# Altium PCB PCB_Formation__ .PcbDoc
Units mm, origin at the board's own origin, x right, y up, seen from the top; angles counter-clockwise.
Board outline 40.25 x 18.25 mm, 4 copper layers (Top Layer, Layer 1, Layer 2, Bottom Layer), stack 0.603 mm thick; 22 components, 12 nets, 102 pads, 17 vias.
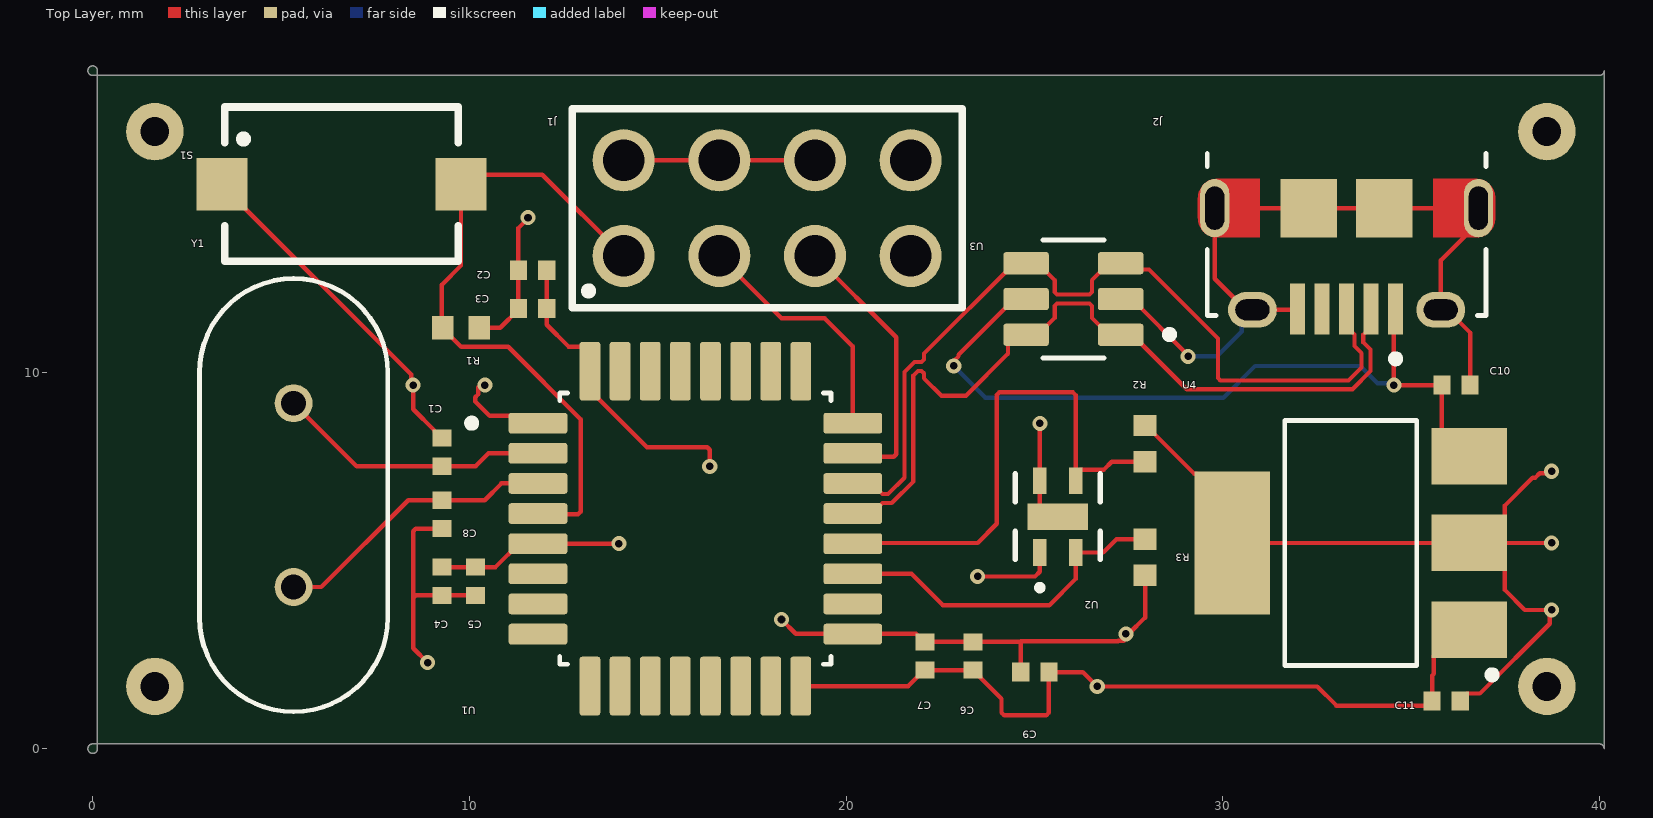
[diagram p0: Top Layer view]
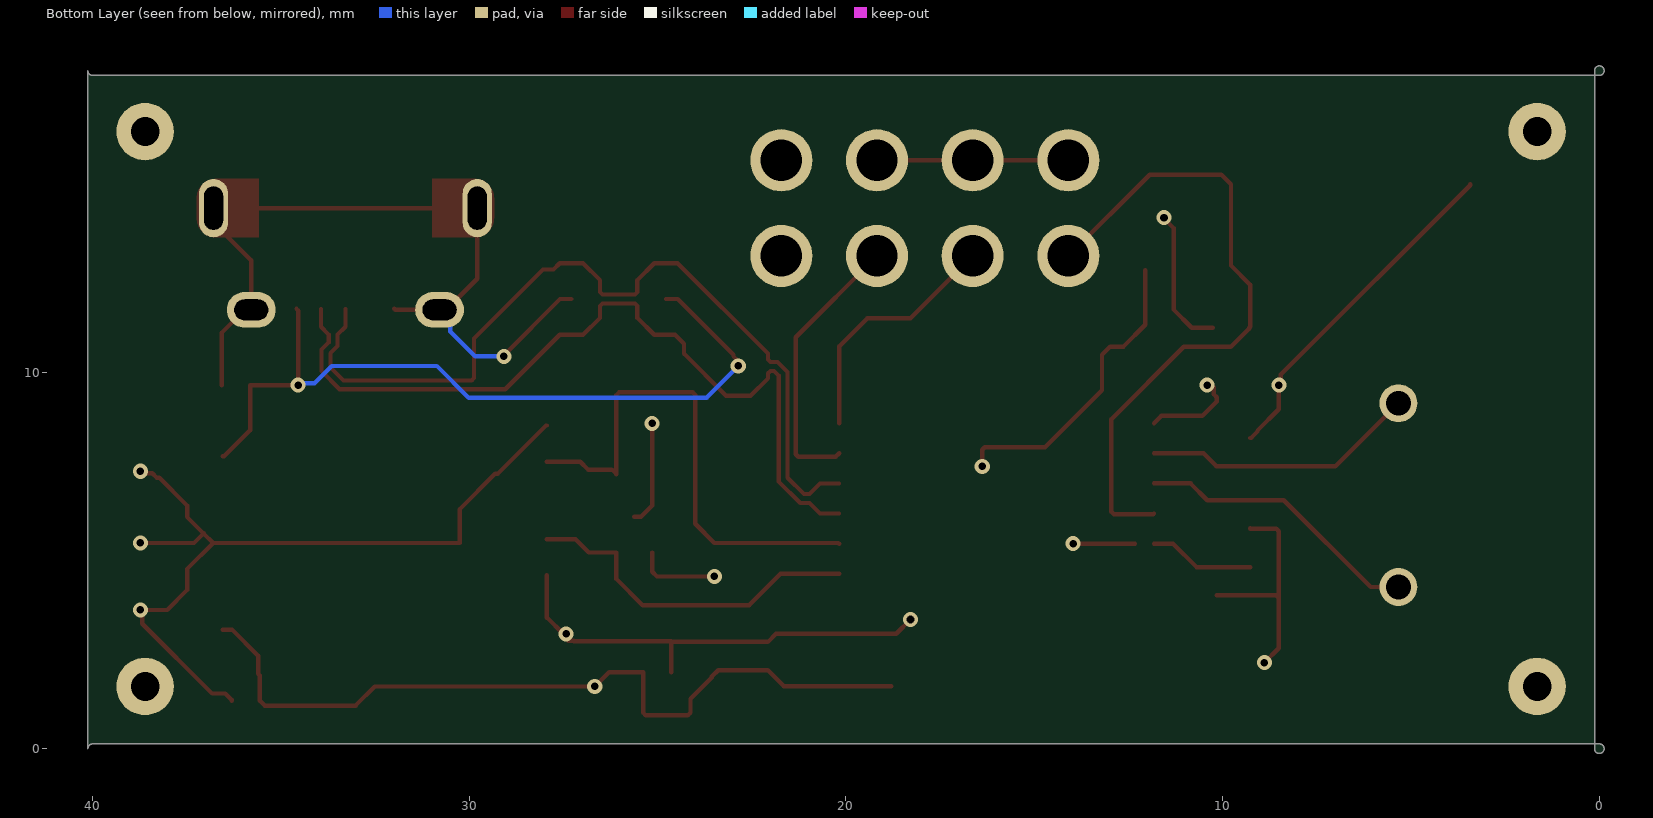
[diagram p1: Bottom Layer view, seen from below]
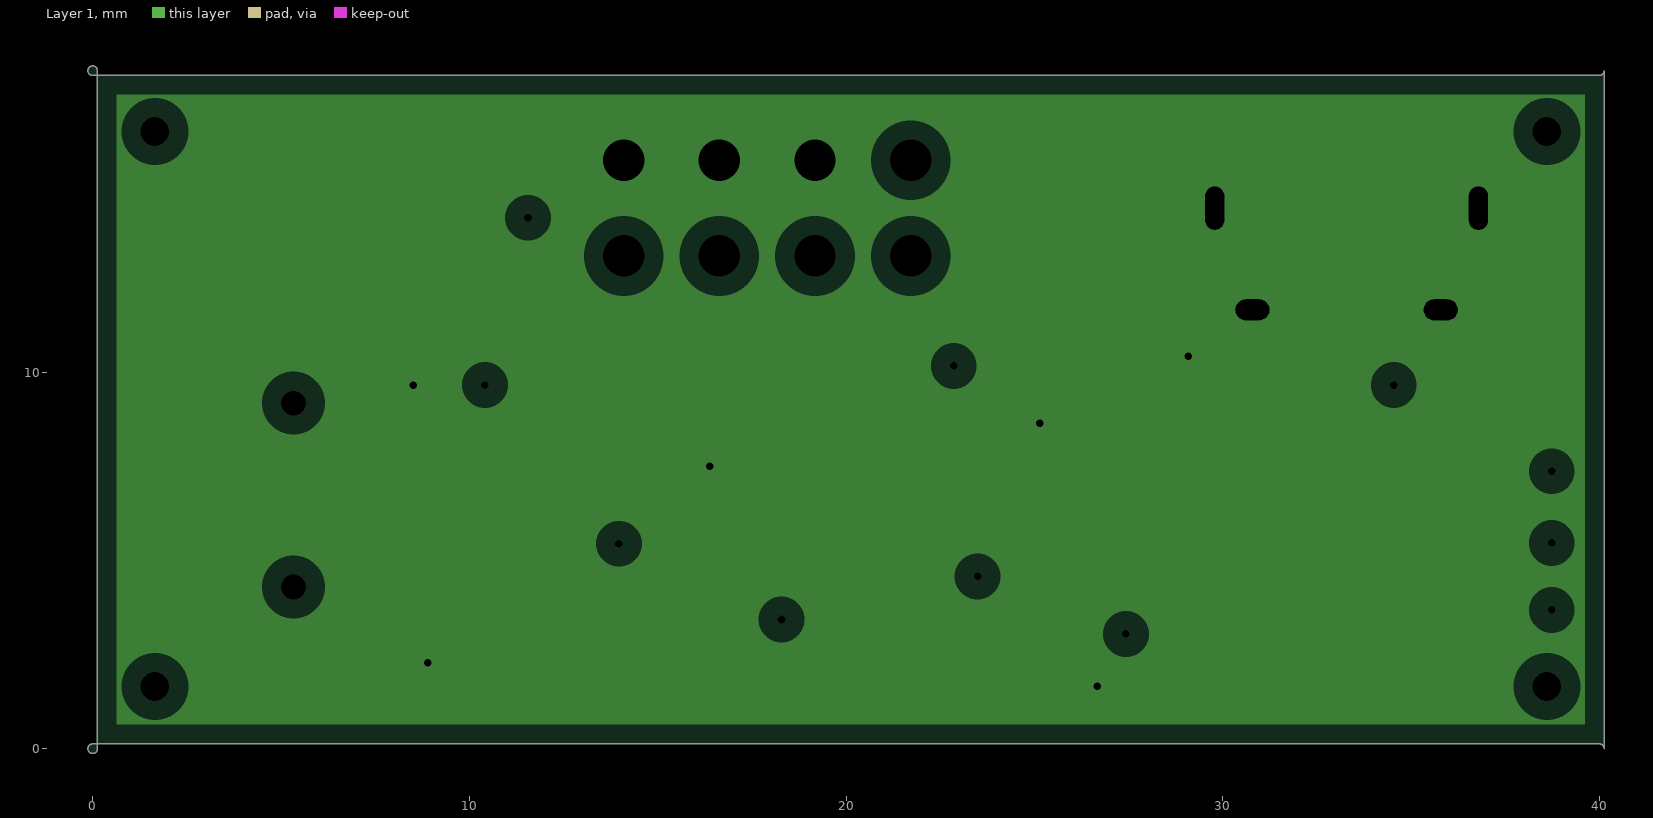
[diagram p2: Layer 1, clearances drawn from the general rule]
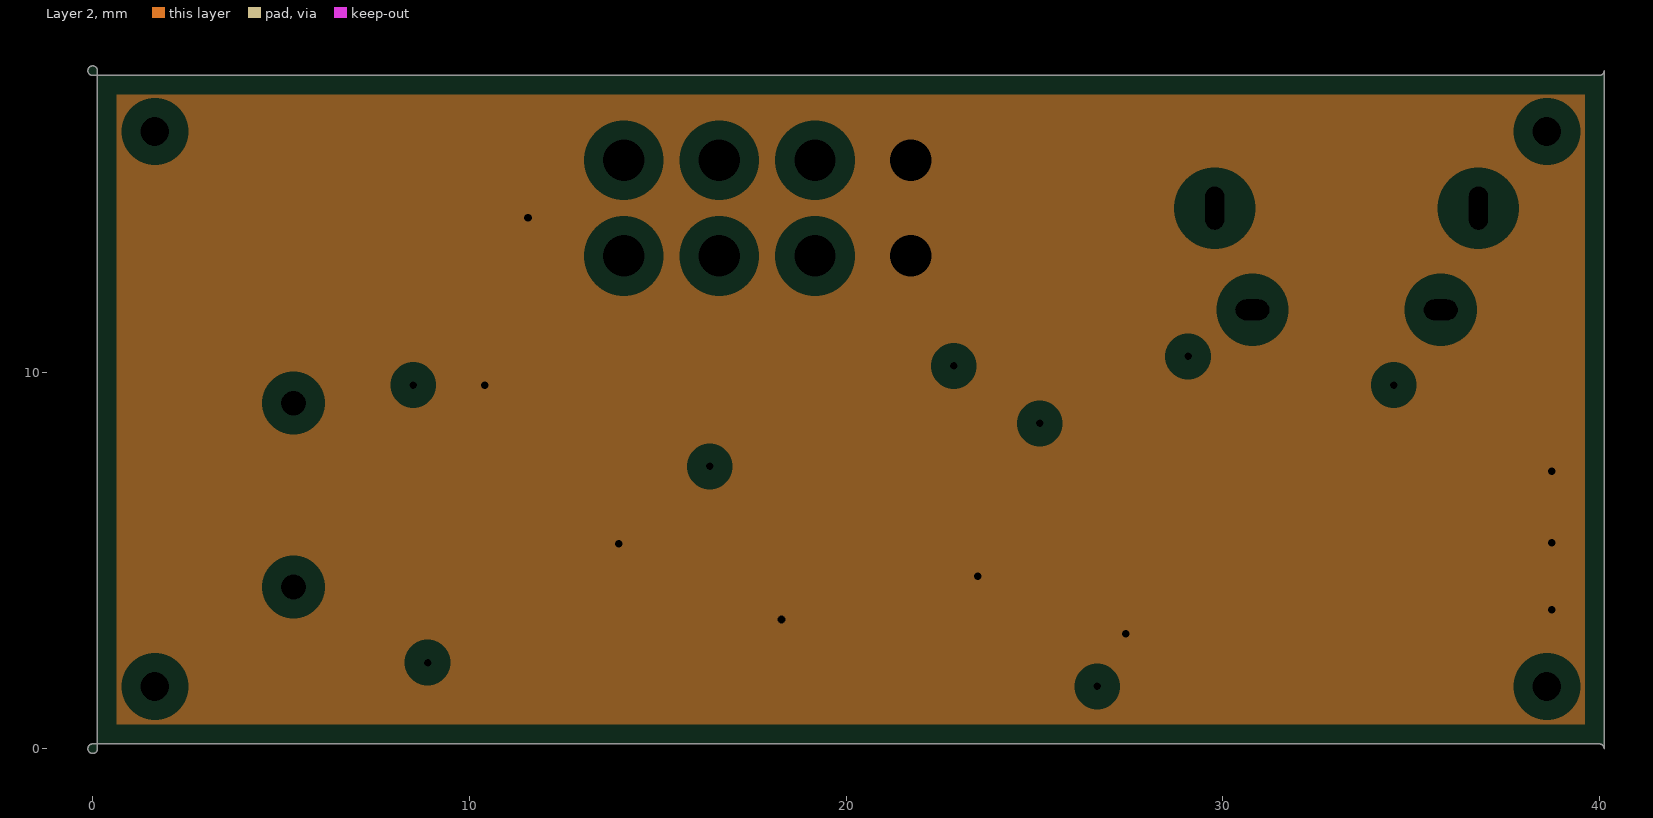
[diagram p3: Layer 2, clearances drawn from the general rule]
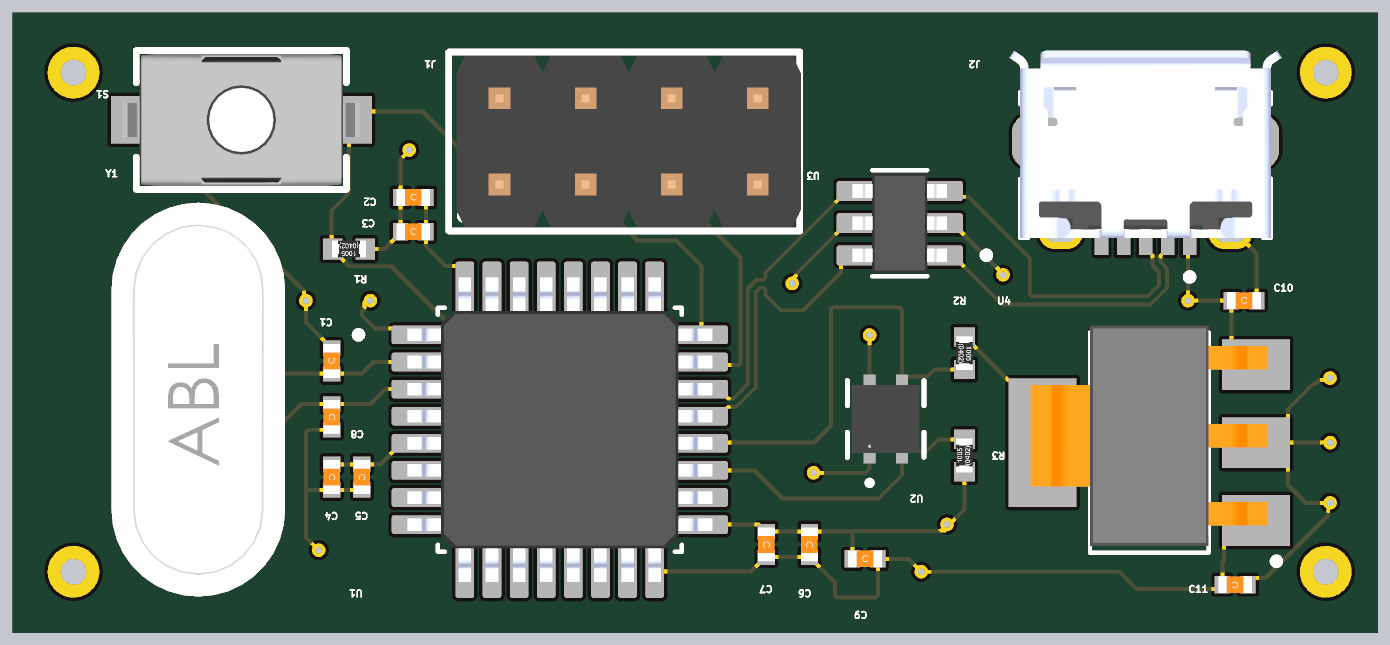
[diagram p4: 3D render of the assembled board from above, using the file's embedded part models]

## Layer stack, top to bottom
Top Solder: solder mask 0.0102, Solder Resist, Dk 3.5
Top Layer: signal copper 0.0356
Dielectric 2: prepreg 0.0711, PP-006, Dk 4.1
Layer 1: plane copper 0.035, net GND
Dielectric 1: dielectric 0.32, FR-4, Dk 4.8
Layer 2: plane copper 0.035, net 3V3
Dielectric 3: prepreg 0.0711, PP-006, Dk 4.1
Bottom Layer: signal copper 0.0356
Bottom Solder: solder mask 0.0102, Solder Resist, Dk 3.5

## Board outline
-0.127,0 cw(c0,0) 0,0.127 40,0.127 cw(c40,0) 40.127,0 40.127,18 cw(c40,18) 40,17.873 0,17.873 cw(c0,18) -0.127,18 cw(c0,18) 0,18.127 cw(c0,18) 0.127,18 0.127,0 cw(c0,0) 0,-0.127 cw(c0,0)

## Design rules (kind name [scope] priority, off if disabled: settings)
Clearance [All] p1: gap=0.1 ignorepadtopadclearanceinfootprint=FALSE
DiffPairsRouting [InDifferentialPair('D')] p1: maxlimit=0.127 minlimit=0.127 mostfreqgap=0.127 toplayer_minwidth=0.11 toplayer_maxwidth=0.11 toplayer_prefwidth=0.11 bottomlayer_minwidth=0.11 bottomlayer_maxwidth=0.11 bottomlayer_prefwidth=0.11 impedanceprofiledriven=TRUE impedanceprofileid={3EE8073C-6099-43B5-B916-C35761998A20} impedanceprofilevalue=90.000000 maxuncoupledlength=12.7
HoleSize [All] p1: absolutevalues=TRUE maxlimit=5 minlimit=0.2 maxpercent=80.000 minpercent=20.000
MinimumSolderMaskSliver [All] p1: minsoldermaskwidth=0.045
PlaneClearance [All] p1: clearance=0.508
PlaneConnect [All] p1: planeconnectstyle=Relief reliefexpansion=0.508 reliefentries=4 reliefconductorwidth=0.254 reliefairgap=0.254
PolygonConnect [All] p1: connectstyle=Relief reliefconductorwidth=0.254 reliefentries=4 polygonreliefangle="90 Angle" airgapwidth=0.254
RoutingVias [All] p1: holewidth=0.711 width=1.27 viastyle="Through Hole" minholewidth=0.711 minwidth=1.27 maxholewidth=0.711 maxwidth=1.27
SilkToSilkClearance [All] p1: silktosilkclearance=0.05
SilkToSolderMaskClearance [IsPad] p1: minsilkscreentomaskgap=0.05 clearancetoexposedcopper=TRUE
SolderMaskExpansion [All] p1: expansion=0.102 istentingtop=FALSE
SupplyNets "Schematic Supply Nets_2" [InNet('5V')] p1: voltage=0.000
SupplyNets "Schematic Supply Nets_1" [InNet('3V3')] p2: voltage=0.000
SupplyNets "Schematic Supply Nets" [InNet('GND')] p3: voltage=0.000
Width Width_impedance [All] p1: maxlimit=0.116 minlimit=0.116 preferedwidth=0.116 minimp=50.000000 maximp=50.000000 favimp=50.000000
Width Width_POWER [InNetClass('POWER')] p2: maxlimit=0.3 minlimit=0.3 preferedwidth=0.3
23 further rules are at their usual default settings.

## Classes and differential pairs
net class POWER: 3V3 5V GND
component class U_USB: J2 U3
component class U_POWER: C10 C11 U4
component class U_MCU: C1 C2 C3 C4 C5 C6 C7 C8 J1 R1 S1 U1 Y1
component class U_Capteur: C9 R2 R3 U2
differential pair D: +D_P -D_N

## Components (designator, comment, footprint, x,y, rotation, side; value= is the part's Value field where it differs from the comment)
C1 "22pF" CAP_0402L 9.271,7.874 r90 top value=100nF
C2 "4.7uF" CAP_0402L 11.678,12.7 r0 top value=100nF
C3 "100nF" CAP_0402L 11.678,11.684 r0 top
C4 "4.7uF" CAP_0402L 9.271,4.445 r270 top value=100nF
C5 "100nF" CAP_0402L 10.16,4.445 r270 top
C6 "1uF" CAP_0402L 23.368,2.46 r270 top value=100nF
C7 "10nF" CAP_0402L 22.098,2.46 r270 top value=100nF
C8 "22pF" CAP_0402L 9.271,6.223 r270 top value=100nF
C9 "100nF" CAP_0402L 25.013,2.032 r0 top
C10 "10uF" CAP_0402L 36.195,9.652 r0 top value=100nF
C11 "10uF" CAP_0402L 35.935,1.27 r180 top value=100nF
J1 "6130XX21121_61300821121" 61300821121 17.907,14.351 r0 top
J2 "10118194-0001LF" AMPHENOL_10118194-0001LF 33.29,14.351 r180 top
R1 "10K" RES_0402N 9.779,11.176 r180 top value=0
R2 "4K7" RES_0402N 27.94,8.1 r270 top value=0
R3 "4K7" RES_0402N 27.94,5.08 r90 top value=0
S1 "434123025816" 434123025816 6.604,14.986 r0 top
U1 "STM32F042K6T6TR" QFP80P900X900X160-32N 16.002,5.842 r0 top
U2 "ENS210-LQFM" SON-04-ENS210_2X2_AMS 25.621,6.159 r90 top
U3 "USBLC6-2SC6" SOT95P280X145-6N 26.035,11.938 r180 top
U4 "NCP1117LPST33T3G" SOT230P700X175-4N 33.401,5.461 r180 top
Y1 "ABL-8.000MHZ-B2" XTAL_HC49P488W46L1150T500H350 5.334,6.731 r90 top

## Footprints (in the part's own frame and the unit in brackets; to place one, negate y for a bottom-side part, rotate by r counter-clockwise, add the part's x,y. Pads: shape width x height; smd on the part's side, far side on the other; paste and mask are expansions set on the pad)
61300821121 [mm]
  round 1.65 hole 1.1: 1(-3.81,-1.27) 2(-3.81,1.27) 3(-1.27,-1.27) 4(-1.27,1.27) 5(1.27,-1.27) 6(1.27,1.27) 7(3.81,-1.27) 8(3.81,1.27)
  silkscreen extent -5.18,-2.64 5.18,2.64, body extent -4.95,-2.54 5.21,2.54, height 8.54
434123025816 [mm]
  rect 1.35x1.4 smd paste+0 mask+0.102: 1(-3.175,0) 2(3.175,0)
  silkscreen extent -3.1,-2.05 3.1,2.05, body extent -3.5,-1.95 3.5,1.95, height 2.5
AMPHENOL_10118194-0001LF [mm]
  rect 0.4x1.35 smd: 1(-1.3,2.675) 2(-0.65,2.675) 3(0,2.675) 4(0.65,2.675) 5(1.3,2.675)
  oval 0.775x1.55 hole 0.5 slot 1.15 at 90 deg mask+0: SH1(-3.5,0) SH4(3.5,0)
  rect 1.5x1.55 smd: SH2(1,0) SH3(-1,0)
  oval 1.3x0.95 hole 0.55 slot 0.9 at 0 deg: SH5(-2.5,2.7) SH6(2.5,2.7)
  Top Layer region: 3.471,0.774 3.497,0.772 3.523,0.769 3.549,0.764 3.574,0.758 3.6,0.751 3.624,0.742 3.648,0.732 3.672,0.721 3.695,0.708 3.717,0.694 3.739,0.68 3.76,0.664 3.78,0.647 3.799,0.629 3.817,0.61 3.834,0.59 3.85,0.569 3.864,0.547 3.878,0.525 3.891,0.502 3.902,0.478 3.912,0.454 3.921,0.43 3.928,0.404 3.934,0.379 3.939,0.353 3.942,0.327 3.944,0.301 3.945,0.275 3.945,-0.275 3.944,-0.301 3.942,-0.327 3.939,-0.353 3.934,-0.379 3.928,-0.404 3.921,-0.43 3.912,-0.454 3.902,-0.478 3.891,-0.502 3.878,-0.525 3.864,-0.547 3.85,-0.569 3.834,-0.59 3.817,-0.61 3.799,-0.629 3.78,-0.647 3.76,-0.664 3.739,-0.68 3.717,-0.694 3.695,-0.708 3.672,-0.721 3.648,-0.732 3.624,-0.742 3.6,-0.751 3.574,-0.758 3.549,-0.764 3.523,-0.769 3.497,-0.772 3.471,-0.774 3.445,-0.775 2.3,-0.775 2.3,0.775 3.445,0.775
  Top Layer region: -2.3,-0.775 -3.445,-0.775 -3.471,-0.774 -3.497,-0.772 -3.523,-0.769 -3.549,-0.764 -3.574,-0.758 -3.6,-0.751 -3.624,-0.742 -3.648,-0.732 -3.672,-0.721 -3.695,-0.708 -3.717,-0.694 -3.739,-0.68 -3.76,-0.664 -3.78,-0.647 -3.799,-0.629 -3.817,-0.61 -3.834,-0.59 -3.85,-0.569 -3.864,-0.547 -3.878,-0.525 -3.891,-0.502 -3.902,-0.478 -3.912,-0.454 -3.921,-0.43 -3.928,-0.404 -3.934,-0.379 -3.939,-0.353 -3.942,-0.327 -3.944,-0.301 -3.945,-0.275 -3.945,0.275 -3.944,0.301 -3.942,0.327 -3.939,0.353 -3.934,0.379 -3.928,0.404 -3.921,0.43 -3.912,0.454 -3.902,0.478 -3.891,0.502 -3.878,0.525 -3.864,0.547 -3.85,0.569 -3.834,0.59 -3.817,0.61 -3.799,0.629 -3.78,0.647 -3.76,0.664 -3.739,0.68 -3.717,0.694 -3.695,0.708 -3.672,0.721 -3.648,0.732 -3.624,0.742 -3.6,0.751 -3.574,0.758 -3.549,0.764 -3.523,0.769 -3.497,0.772 -3.471,0.774 -3.445,0.775 -2.3,0.775
  silkscreen extent -3.7,-1.45 3.7,4.1, body extent -4.02,-2.68 4.02,2.85, height 2.67
CAP_0402L [mil]
  rect 18x20 smd: 1(14.76,0) 2(-14.76,0)
  body extent -20,-10 20,10, height 19
QFP80P900X900X160-32N [mm]
  rrect25% 1.56x0.55 smd paste+0 mask+0.102: 1(-4.18,2.8) 2(-4.18,2) 3(-4.18,1.2) 4(-4.18,0.4) 5(-4.18,-0.4) 6(-4.18,-1.2) 7(-4.18,-2) 8(-4.18,-2.8) 17(4.18,-2.8) 18(4.18,-2) 19(4.18,-1.2) 20(4.18,-0.4) 21(4.18,0.4) 22(4.18,1.2) 23(4.18,2) 24(4.18,2.8)
  rrect25% 0.55x1.56 smd paste+0 mask+0.102: 9(-2.8,-4.18) 10(-2,-4.18) 11(-1.2,-4.18) 12(-0.4,-4.18) 13(0.4,-4.18) 14(1.2,-4.18) 15(2,-4.18) 16(2.8,-4.18) 25(2.8,4.18) 26(2,4.18) 27(1.2,4.18) 28(0.4,4.18) 29(-0.4,4.18) 30(-1.2,4.18) 31(-2,4.18) 32(-2.8,4.18)
  silkscreen extent -6.04,-3.6 3.6,3.6, body extent -4.5,-4.5 4.5,4.5, height 1.6
RES_0402N [mm]
  rect 0.57x0.62 smd: 1(0.48,0) 2(-0.48,0)
  body extent -0.5,-0.25 0.5,0.25, height 0.35
SON-04-ENS210_2X2_AMS [mil]
  rect 28x14 smd paste+0 mask+0: 1(-37.5,18.7) 2(-37.5,-18.7) 3(37.5,-18.7) 4(37.5,18.7)
  rect 28x63 smd paste+0 mask+0: 5(0,0)
  silkscreen extent -77,-44 44,45, body extent -39,-39 39,39, height 32
SOT95P280X145-6N [mm]
  rrect25% 1.21x0.59 smd: 1(-1.255,0.95) 2(-1.255,0) 3(-1.255,-0.95) 4(1.255,-0.95) 5(1.255,0) 6(1.255,0.95)
  silkscreen extent -2.66,-1.56 0.81,1.56, body extent -1.4,-1.46 1.4,1.46, height 1.42
SOT230P700X175-4N [mm]
  rect 2x1.5 smd paste+0 mask+0.102: 1(-3.15,2.3) 2(-3.15,0) 3(-3.15,-2.3)
  rect 2x3.8 smd paste+0 mask+0.102: 4(3.15,0)
  silkscreen extent -3.85,-3.25 1.75,3.6, body extent -3.5,-3.45 3.5,3.05, height 1.57
XTAL_HC49P488W46L1150T500H350 [mm]
  round 1.007 hole 0.657: 1(-2.44,0) 2(2.44,0)
  silkscreen extent -5.75,-2.5 5.75,2.5, body extent -5.75,-2.5 5.75,2.5, height 3.25

## Part data
C1 C8: library part "CAP CER 22pF", "CAP CER 22pF 16V X7R 10% 0402", Capacitance=100nF, Capacitor Type=Ceramic, Case/Package=0402, Dielectric=X7R, Max Operating Temperature=125°C, Min Operating Temperature=-55°C, Package Quantity=50000, Tolerance=10%, Voltage Rating=16V, Construction=Flat, Depth=0.5mm, Dielectric Material=Ceramic, Height=0.5mm, Length=1mm, Mount="Surface Mount", Packaging="Tape and Reel", RoHS=Yes, Series=C, Thickness=0.022inch, Voltage Rating (DC)=16V, Width=0.02inch
C2 C4: library part "CAP CER 4.7uF", "CAP CER 4.7uF 16V X7R 10% 0402", Capacitance=100nF, Capacitor Type=Ceramic, Case/Package=0402, Dielectric=X7R, Max Operating Temperature=125°C, Min Operating Temperature=-55°C, Package Quantity=50000, Tolerance=10%, Voltage Rating=16V, Construction=Flat, Depth=0.5mm, Dielectric Material=Ceramic, Height=0.5mm, Length=1mm, Mount="Surface Mount", Packaging="Tape and Reel", RoHS=Yes, Series=C, Thickness=0.022inch, Voltage Rating (DC)=16V, Width=0.02inch
C3 C5 C9: library part "CAP CER 100nF", "CAP CER 100nF 16V X7R 10% 0402", Capacitor Type=Ceramic, Case/Package=0402, Dielectric=X7R, Max Operating Temperature=125°C, Min Operating Temperature=-55°C, Package Quantity=50000, Tolerance=10%, Voltage Rating=16V, Capacitance=100nF, Construction=Flat, Depth=0.5mm, Dielectric Material=Ceramic, Height=0.5mm, Length=1mm, Mount="Surface Mount", Packaging="Tape and Reel", RoHS=Yes, Series=C, Thickness=0.022inch, Voltage Rating (DC)=16V, Width=0.02inch
C6: library part "CAP CER 100nF_1", "CAP CER 100nF 16V X7R 10% 0402", Capacitance=100nF, Capacitor Type=Ceramic, Case/Package=0402, Dielectric=X7R, Max Operating Temperature=125°C, Min Operating Temperature=-55°C, Package Quantity=50000, Tolerance=10%, Voltage Rating=16V, Construction=Flat, Depth=0.5mm, Dielectric Material=Ceramic, Height=0.5mm, Length=1mm, Mount="Surface Mount", Packaging="Tape and Reel", RoHS=Yes, Series=C, Thickness=0.022inch, Voltage Rating (DC)=16V, Width=0.02inch
C7: library part "CAP CER 100nF", "CAP CER 100nF 16V X7R 10% 0402", Capacitance=100nF, Capacitor Type=Ceramic, Case/Package=0402, Dielectric=X7R, Max Operating Temperature=125°C, Min Operating Temperature=-55°C, Package Quantity=50000, Tolerance=10%, Voltage Rating=16V, Construction=Flat, Depth=0.5mm, Dielectric Material=Ceramic, Height=0.5mm, Length=1mm, Mount="Surface Mount", Packaging="Tape and Reel", RoHS=Yes, Series=C, Thickness=0.022inch, Voltage Rating (DC)=16V, Width=0.02inch
C10 C11: library part "CAP CER 10µF", "CAP CER 10µF 16V X7R 10% 0402", Capacitance=100nF, Capacitor Type=Ceramic, Case/Package=0402, Dielectric=X7R, Max Operating Temperature=125°C, Min Operating Temperature=-55°C, Package Quantity=50000, Tolerance=10%, Voltage Rating=16V, Construction=Flat, Depth=0.5mm, Dielectric Material=Ceramic, Height=0.5mm, Length=1mm, Mount="Surface Mount", Packaging="Tape and Reel", RoHS=Yes, Series=C, Thickness=0.022inch, Voltage Rating (DC)=16V, Width=0.02inch
J1: "Connector Header Through Hole 8 position 0.100 (2.54mm)", Package=None, Check_prices=https://www.snapeda.com/parts/61300821121/Wurth+Electronics/view-part/?ref=eda, MF="Wurth Electronics", MP=61300821121, SnapEDA_Link=https://www.snapeda.com/parts/61300821121/Wurth+Electronics/view-part/?ref=snap
J2: "Micro USB, Input Output Connectors, B TYPE RECEPTACLE with flange", Package=None, Check_prices=https://www.snapeda.com/parts/10118194-0001LF/Amphenol+FCI/view-part/?ref=eda, MF="Amphenol ICC", MP=10118194-0001LF, SnapEDA_Link=https://www.snapeda.com/parts/10118194-0001LF/Amphenol+FCI/view-part/?ref=snap
R1: library part "RES SMD 10K", "RES SMD 10K OHM 1% 1/16W 0402", Case Code (Imperial)=0402, Case Code (Metric)=1005, Max Operating Temperature=155°C, Min Operating Temperature=-55°C, Power Rating=62.5mW, Resistance=10kR, Temperature Coefficient=100ppm/°C, Tolerance=1%, Voltage Rating=50V, Case/Package=0402, Composition="Thick Film", Depth=0.5mm, Height=0.32mm, Lead Free="Lead Free", Lead Pitch=0.2mm, Length=1mm, Military Standard=Not, Mount=SMD, Number of Pins=2, Number of Terminations=2, Packaging="Tape and Reel", REACH SVHC="No SVHC", RoHS=Yes, Termination=SMD/SMT, Voltage Rating (DC)=50V, Width=0.5mm, Working Voltage=50V
R2 R3: library part Res_4K7, "RES SMD 4.7K OHM 1% 1/16W 0402", Case Code (Imperial)=0402, Case Code (Metric)=1005, Max Operating Temperature=155°C, Min Operating Temperature=-55°C, Power Rating=62.5mW, Resistance=10kR, Temperature Coefficient=100ppm/°C, Tolerance=1%, Voltage Rating=50V, Case/Package=0402, Composition="Thick Film", Depth=0.5mm, Height=0.32mm, Lead Free="Lead Free", Lead Pitch=0.2mm, Length=1mm, Military Standard=Not, Mount=SMD, Number of Pins=2, Number of Terminations=2, Packaging="Tape and Reel", REACH SVHC="No SVHC", RoHS=Yes, Termination=SMD/SMT, Voltage Rating (DC)=50V, Width=0.5mm, Working Voltage=50V
S1: "Tactile Switch SPST-NO Top Actuated Surface Mount", Package=None, Check_prices=https://www.snapeda.com/parts/434123025816/W%25C3%25BCrth+Elektronik+Midcom/view-part/?ref=eda, MF="WÃ¼rth Elektronik", MP=434123025816, SnapEDA_Link=https://www.snapeda.com/parts/434123025816/W%25C3%25BCrth+Elektronik+Midcom/view-part/?ref=snap
U1: "ARMÂ® CortexÂ®-M0 STM32F0 Microcontroller IC 32-Bit Single-Core 48MHz 32KB (32K x 8) FLASH 32-LQFP (7x7)", Package="LQFP-32 STMicroelectronics", Check_prices=https://www.snapeda.com/parts/STM32F042K6T6TR/STMicroelectronics/view-part/?ref=eda, MF=STMicroelectronics, MP=STM32F042K6T6TR, SnapEDA_Link=https://www.snapeda.com/parts/STM32F042K6T6TR/STMicroelectronics/view-part/?ref=snap
U2: "Description", Manufacturer_Name="ams OSRAM", Copyright="Copyright (C) 2025 Ultra Librarian. All rights reserved.", Manufacturer_Part_Number=ENS210-LQFM, RefDes=RefDes, Type=Type
U3: "17V Clamp 5A (8/20Âµs) Ipp Tvs Diode Surface Mount SOT-23-6", Package="SOT-23-6 STMicroelectronics", Availability="In Stock", Check_prices=https://www.snapeda.com/parts/USBLC6-2SC6/STMicroelectronics/view-part/?ref=eda, MF=STMicroelectronics, MP=USBLC6-2SC6, Price=None, Purchase-URL=https://pricing.snapeda.com/search/part/USBLC6-2SC6/?ref=eda, SnapEDA_Link=https://www.snapeda.com/parts/USBLC6-2SC6/STMicroelectronics/view-part/?ref=snap
U4: "Linear Voltage Regulator IC Positive Fixed 1 Output 1A SOT-223", Package="SOT-223-4 ON Semiconductor", Check_prices=https://www.snapeda.com/parts/NCP1117LPST33T3G/Onsemi/view-part/?ref=eda, MF="ON Semiconductor", MP=NCP1117LPST33T3G, SnapEDA_Link=https://www.snapeda.com/parts/NCP1117LPST33T3G/Onsemi/view-part/?ref=snap
Y1: "HC/49US (AT49) MICROPROCESSOR CRYSTAL", Package="HC-49/US ABRACON", Availability="In Stock", Check_prices=https://www.snapeda.com/parts/ABL-8.000MHZ-B2/Abracon+LLC/view-part/?ref=eda, MF=Abracon, MP=ABL-8.000MHZ-B2, Price=None, Purchase-URL=https://pricing.snapeda.com/search/part/ABL-8.000MHZ-B2/?ref=eda, SnapEDA_Link=https://www.snapeda.com/parts/ABL-8.000MHZ-B2/Abracon+LLC/view-part/?ref=snap

## Free pads (board coordinates)
  round 1.524 hole 0.762: 2(38.608,16.383) 3(38.608,1.651) 4(1.651,1.651) 5(1.651,16.383)

## Via types
v1: diameter 0.4, hole 0.2, Top Layer to Bottom Layer, 17 vias

## Nets (pads, with @x,y where several pads share a name; then routed paths per layer and width w, separated by ;. In a path a pad name is that pad's centre, name@x,y a point inside that pad or via, vN(x,y) a via of type N, cw(c..) or ccw(c..) an arc to the next point about the centre after c; other vN are vias at no path point)
3V3: C2.2 C3.2 C4.2 C5.2 C6.2 C7.2 C9.2 C11.2 J1.7 J1.8 R1.2 R2.2 R3.2 U1.1 U1.5 U1.17 U2.1 U4.2 U4.4 | length 47.1
  Top Layer w0.116: C4.2 C5.2 10.695,4.82 11.317,5.442 U1.5 ; R1.2 10.82,11.176 11.303,11.659 C3.2 11.303,13.822 11.557,14.076 v1(11.557,14.097) ; v1(10.414,9.652) 10.36,9.598 10.233,9.598 10.233,9.405 10.16,9.332 10.16,9.218 10.543,8.835 11.629,8.835 U1.1 ; U1.5@12.327,5.442 v1(13.97,5.442) ; v1(18.288,3.429) 18.669,3.048 21.859,3.048 C7.2@22.073,2.835 ; C7.2 C6.2 24.638,2.835 ; v1(23.495,4.572) 25.019,4.572 25.146,4.699 U2.1 ; C9.2 24.638,2.835 ; R3.2 27.94,3.479 27.509,3.048 v1(27.432,3.048) 27.378,2.994 27.378,2.867 27.236,2.867 27.222,2.853 24.638,2.853 24.638,2.835 ; R2.2 27.965,8.58 29.242,7.303 29.309,7.303 30.251,6.361 U4.4 U4.2 U4.2@36.801,5.461 ; C11.2 36.31,1.295 36.48,1.466 36.83,1.466 38.681,3.317 38.681,3.629 v1(38.735,3.683) 38.022,3.683 37.493,4.212 37.493,4.769 U4.2@36.801,5.461 ; v1(38.735,5.461) 37.309,5.461 U4.2@37.055,5.715 ; v1(38.735,7.366) 38.681,7.312 38.418,7.312 38.303,7.197 38.234,7.197 37.493,6.456 37.493,6.153 U4.2@37.055,5.715 ; U4.2@36.801,5.461 U4.2@37.055,5.715
5V: C10.2 J2.1 U3.5 U4.3 | length 20.9
  Top Layer w0.116: v1(22.86,10.16) 22.86,10.287 22.987,10.414 22.987,10.455 24.47,11.938 U3.5 ; J2.1 34.544,11.63 v1(34.544,9.652) C10.2 35.82,8.453 36.512,7.761 U4.3
  Bottom Layer w0.116: v1(22.86,10.16) 23.701,9.319 30.02,9.319 30.861,10.16 33.655,10.16 34.112,9.703 34.493,9.703 v1(34.544,9.652)
D_N: J2.2 U1.21 U3.1 U3.6 | length 21.8
  Top Layer w0.11: U1.21 20.69,6.242 20.971,6.523 21.216,6.523 21.787,7.094 21.787,9.904 21.914,10.031 22.005,10.031 22.07,9.966 22.07,9.833 22.533,9.37 23.187,9.37 24.304,10.486 24.304,10.75 24.542,10.988 25.09,10.988 25.54,11.438 25.54,11.755 25.605,11.819 26.465,11.819 26.53,11.755 26.53,11.438 26.98,10.988 27.6,10.988 29.046,9.542 33.443,9.542 33.924,10.022 33.924,10.598 33.734,10.788 33.734,10.995 33.94,11.201 J2.2
D_P: J2.3 U1.22 U3.3 U3.4 | length 22.7
  Top Layer w0.11: U1.22 20.69,7.042 20.971,6.761 21.117,6.761 21.549,7.193 21.549,10.002 21.815,10.268 22.005,10.268 22.07,10.333 22.07,10.488 24.47,12.888 25.09,12.888 25.54,12.438 25.54,12.121 25.605,12.057 26.465,12.057 26.53,12.121 26.53,12.438 26.98,12.888 27.6,12.888 27.766,12.722 28.045,12.722 29.873,10.894 29.873,9.844 29.938,9.779 33.345,9.779 33.686,10.121 33.686,10.499 33.496,10.689 33.496,10.995 33.29,11.201 J2.3
GND: C1.1 C2.1 C3.1 C4.1 C5.1 C6.1 C7.1 C8.1 C9.1 C10.1 C11.1 J1.2 J1.4 J1.6 J2.5 J2.SH1 J2.SH2 J2.SH3 J2.SH4 J2.SH5 J2.SH6 S1.1 U1.16 U1.32 U2.4 U2.5 U3.2 U4.1 | length 74.7
  Top Layer w0.116: S1.1 3.429,14.961 8.455,9.935 8.455,9.706 v1(8.509,9.652) 8.509,9.011 9.075,8.445 9.075,8.419 9.246,8.249 C1.1 ; v1(8.89,2.286) 8.509,2.667 8.509,4.002 ; C8.1 9.265,5.842 8.577,5.842 8.509,5.774 8.509,4.002 ; C5.1 C4.1 8.577,4.07 8.509,4.002 ; C2.1 C3.1 12.053,11.256 12.633,10.675 12.986,10.675 13.202,10.459 U1.32 13.202,9.517 14.718,8.001 16.315,8.001 16.383,7.933 v1(16.383,7.493) ; J1.2 J1.4 J1.6 ; U1.16@18.796,1.656 U1.16 21.65,1.662 C7.1@22.073,2.085 ; C7.1 C6.1 23.393,2.085 23.564,1.914 23.564,1.889 24.13,1.323 24.13,0.957 24.198,0.889 25.32,0.889 25.388,0.957 C9.1 26.289,2.032 v1(26.67,1.651) 32.512,1.651 33.02,1.143 35.433,1.143 C11.1 35.56,1.943 35.609,1.992 35.609,2.469 36.301,3.161 U4.1 ; v1(25.146,8.636) 25.146,6.457 25.443,6.159 U2.5 ; U3.2 27.592,11.938 29.083,10.447 v1(29.083,10.414) ; J2.5 31.965,11.651 J2.SH6 30.615,11.651 29.79,12.476 J2.SH4 J2.SH2 J2.SH3 J2.SH1 36.79,13.964 35.79,12.964 J2.SH5 35.965,11.651 36.57,11.046 C10.1
  Bottom Layer w0.116: v1(29.083,10.414) 29.845,10.414 30.506,11.075 30.506,11.367 J2.SH6
NRST: J1.1 R1.1 S1.2 U1.4 | length 17.6
  Top Layer w0.116: R1.1@9.299,11.151 9.782,10.668 11.034,10.668 12.954,8.748 12.954,6.291 12.886,6.223 11.841,6.223 U1.4 ; R1.1 9.271,11.204 9.271,12.319 9.779,12.827 S1.2 10.033,15.24 11.938,15.24 J1.1
OSC_IN: C1.2 U1.2 Y1.2 | length 7.3
  Top Layer w0.116: Y1.2 7.006,7.499 C1.2 10.166,7.499 10.509,7.842 U1.2
OSC_OUT: C8.2 U1.3 Y1.1 | length 7.6
  Top Layer w0.116: Y1.1 6.069,4.291 8.376,6.598 C8.2 10.408,6.598 10.852,7.042 U1.3
SCL: R3.1 U1.19 U2.2 | length 9.2
  Top Layer w0.116: U1.19 21.74,4.642 22.572,3.81 25.4,3.81 26.096,4.506 U2.2 26.829,5.207 27.182,5.56 R3.1
SDA: R2.1 U1.20 U2.3 | length 13.7
  Top Layer w0.116: U1.20 20.201,5.461 23.495,5.461 24.003,5.969 24.003,9.389 24.071,9.458 26.028,9.458 26.096,9.389 26.096,7.29 26.216,7.409 26.847,7.409 27.057,7.62 R2.1
SWCLK: J1.3 U1.24 | length 6.6
  Top Layer w0.116: J1.3 18.288,11.43 19.431,11.43 20.182,10.679 U1.24
SWDIO: J1.5 U1.23 | length 7.4
  Top Layer w0.116: J1.5 21.336,10.922 21.336,7.815 21.268,7.747 20.277,7.747 U1.23
pads on no net: J2.4 U1.6 U1.7 U1.8 U1.9 U1.10 U1.11 U1.12 U1.13 U1.14 U1.15 U1.18 U1.25 U1.26 U1.27 U1.28 U1.29 U1.30 U1.31

## Polygon pours and split planes (outlines as drawn)
GND on Layer 1 (split plane): 39.617,0.638 0.638,0.638 0.638,17.362 39.617,17.362
3V3 on Layer 2 (split plane): 39.617,0.638 0.638,0.638 0.638,17.362 39.617,17.362

## Silkscreen, mask and mechanical layers (free items; w line width, h text height)
Mechanical 1:
  lines w0.254: 0,0 40,0 40,18 0,18 0,0

## Text inside footprints (layer, text, board x,y; h text height)
J2: Mechanical 13 "PCB EDGE" at 29.04,15.601 h0.81 r180